# Altium PCB ar488_driver_pcb.PcbDoc
Units mil, origin at the board's own origin, x right, y up, seen from the top; angles counter-clockwise.
Board outline 2500 x 3399.72 mil, 2 copper layers (Top Layer, Bottom Layer); 6 components, 36 nets, 144 pads, 65 vias.
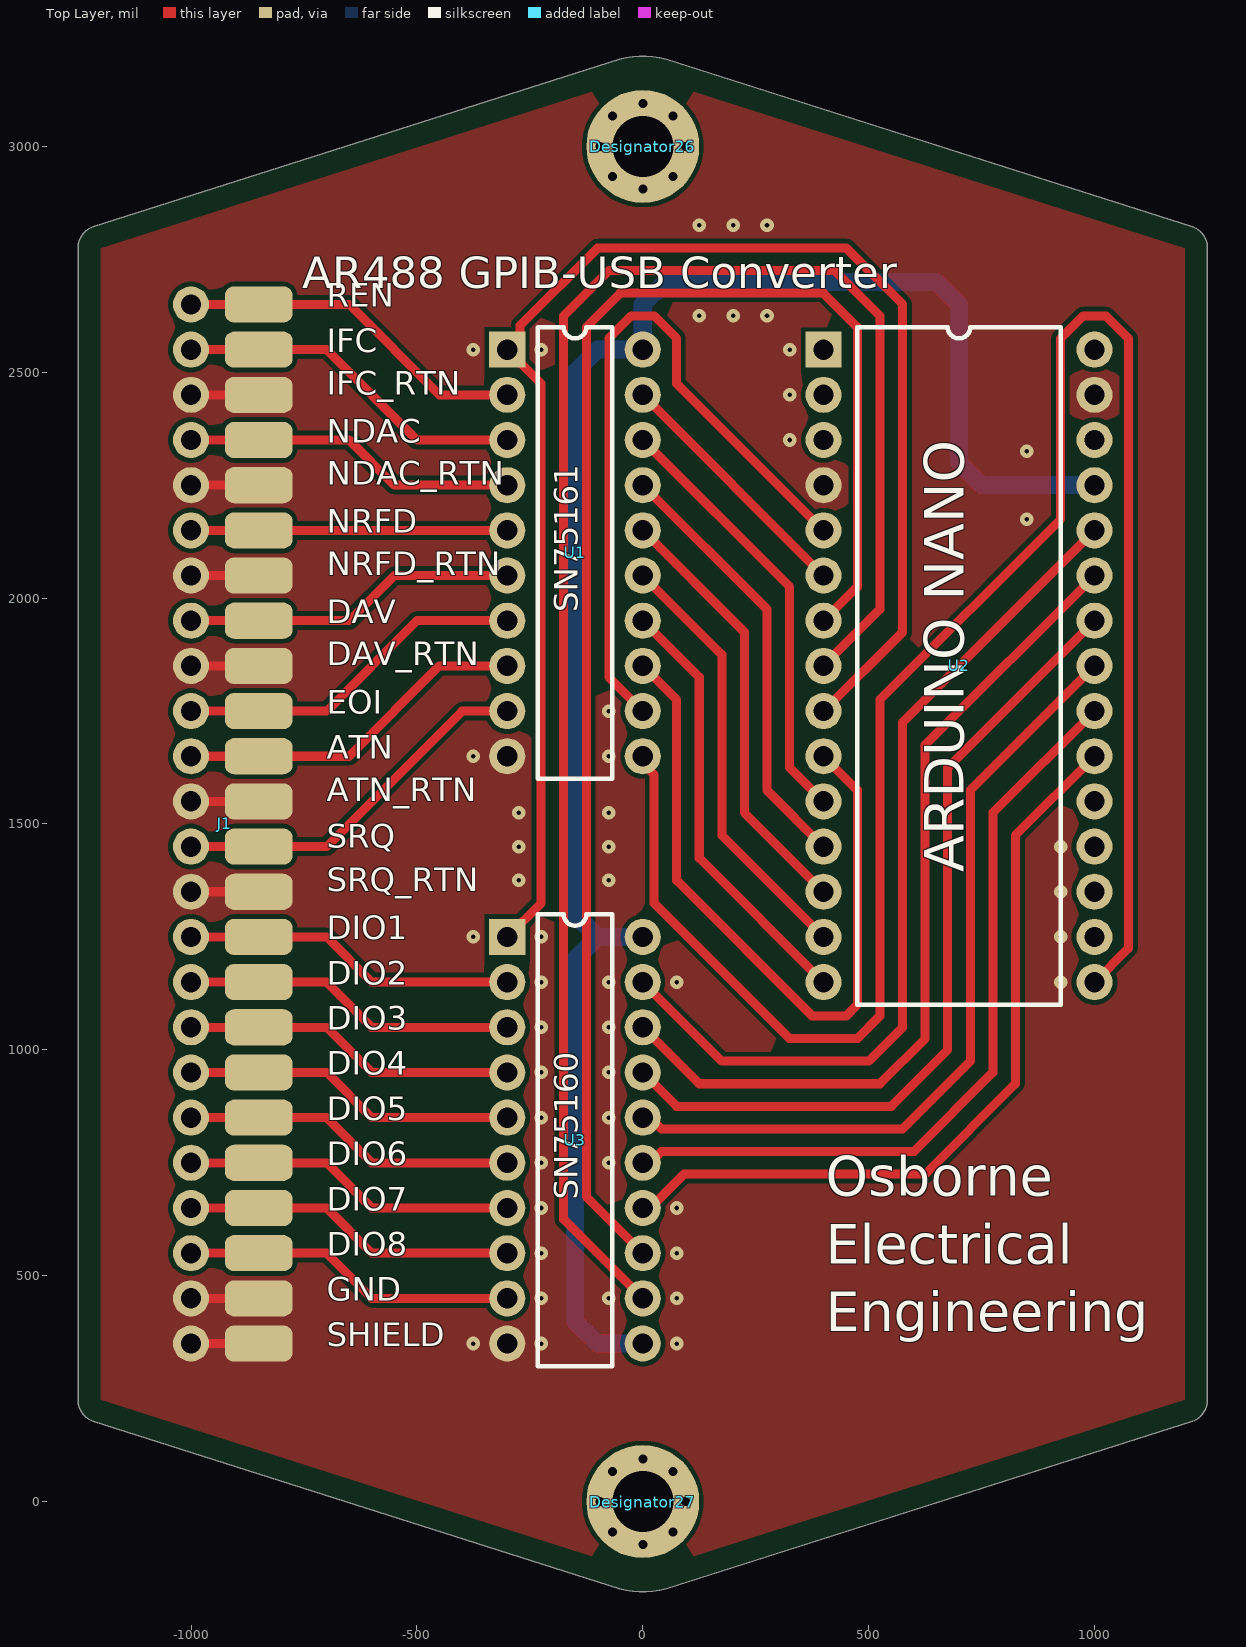
[diagram p0: Top Layer view]
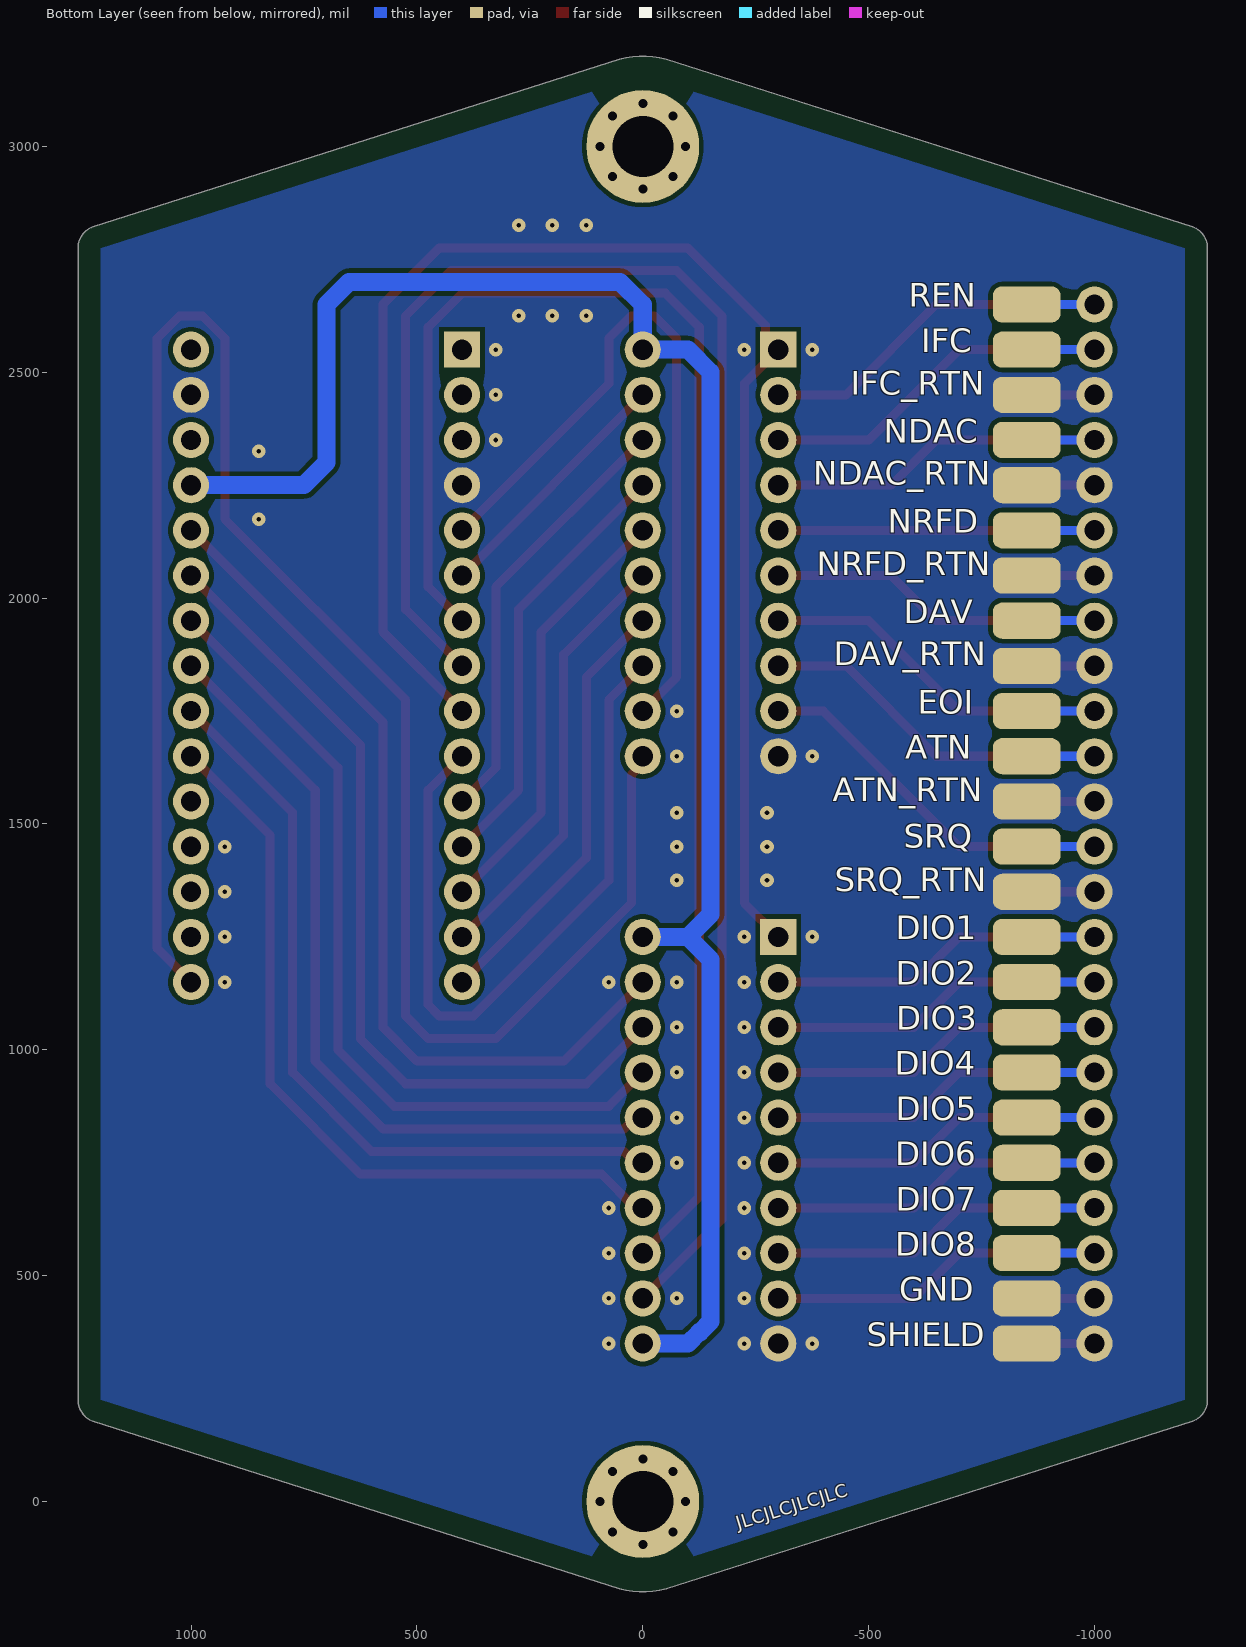
[diagram p1: Bottom Layer view, seen from below]

## Layer stack, top to bottom
Top Solder: solder mask 0.4, Solder Resist, Dk 3.5
Top Layer: signal copper 1.4
Dielectric 1: dielectric 12.6, FR-4, Dk 4.8
Bottom Layer: signal copper 1.4
Bottom Solder: solder mask 0.4, Solder Resist, Dk 3.5

## Board outline
-1250,225 -1250,2775 cw(c-1200,2775) -1217.1,2821.98 -51.76,3193.19 cw(c0,3000) 51.76,3193.19 1217.1,2821.98 cw(c1200,2775) 1250,2775 1250,225 cw(c1200,225) 1217.1,178.02 51.76,-193.19 cw(c0,0) -51.76,-193.19 -1217.1,178.02 cw(c-1200,225)

## Design rules (kind name [scope] priority, off if disabled: settings)
BoardOutlineClearance [All] p1: gap=50 ignorepadtopadclearanceinfootprint=FALSE
Clearance [All] p1: gap=10 ignorepadtopadclearanceinfootprint=FALSE
HoleSize [All] p1: absolutevalues=TRUE maxlimit=200 minlimit=1 maxpercent=80.000 minpercent=20.000
PolygonConnect [All] p1: connectstyle=Direct reliefconductorwidth=10 reliefentries=4 polygonreliefangle="90 Angle" airgapwidth=10
RoutingVias [All] p1: holewidth=28 width=50 viastyle="Through Hole" minholewidth=28 minwidth=50 maxholewidth=28 maxwidth=50
SolderMaskExpansion [All] p1: expansion=4 istentingtop=FALSE
Width [All] p1: maxlimit=100 minlimit=10 preferedwidth=10
29 further rules are at their usual default settings.

## Components (designator, comment, footprint, x,y, rotation, side; value= is the part's Value field where it differs from the comment)
Designator26 "Comment" MTG_HOLE_NO4 0,3000 r0 top locked
Designator27 "Comment" MTG_HOLE_NO4 0,0 r0 top locked
J1 "GPIB" GPIB -1000,2450 r0 top
U1 "SN75161" SN75161 -300,2550 r0 top
U2 "ArduinoNano" NANO 400,2550 r0 top
U3 "SN75160" SN75160 -300,1250 r0 top

## Footprints (in the part's own frame and the unit in brackets; to place one, negate y for a bottom-side part, rotate by r counter-clockwise, add the part's x,y. Pads: shape width x height; smd on the part's side, far side on the other; paste and mask are expansions set on the pad)
GPIB [mil]
  round 80 hole 45 paste-100: 1(0,-1200) 2(0,-1300) 3(0,-1400) 4(0,-1500) 5(0,-700) 6(0,-500) 7(0,-300) 8(0,-100) 9(0,100) 10(0,-1000) 11(0,-800) 12(0,-2100) 13(0,-1600) 14(0,-1700) 15(0,-1800) 16(0,-1900) 17(0,200) 18(0,-600) 19(0,-400) 20(0,-200) 21(0,0) 22(0,-1100) 23(0,-900) 24(0,-2000)
  rrect50% 150x80 smd far side paste-100: 1(150,-1200) 2(150,-1300) 3(150,-1400) 4(150,-1500) 5(150,-700) 6(150,-500) 7(150,-300) 8(150,-100) 9(150,100) 10(150,-1000) 11(150,-800) 12(150,-2100) 13(150,-1600) 14(150,-1700) 15(150,-1800) 16(150,-1900) 17(150,200) 18(150,-600) 19(150,-400) 20(150,-200) 21(150,0) 22(150,-1100) 23(150,-900) 24(150,-2000)
  rrect50% 150x80 smd paste-100: 1(150,-1200) 2(150,-1300) 3(150,-1400) 4(150,-1500) 5(150,-700) 6(150,-500) 7(150,-300) 8(150,-100) 9(150,100) 10(150,-1000) 11(150,-800) 12(150,-2100) 13(150,-1600) 14(150,-1700) 15(150,-1800) 16(150,-1900) 17(150,200) 18(150,-600) 19(150,-400) 20(150,-200) 21(150,0) 22(150,-1100) 23(150,-900) 24(150,-2000)
MTG_HOLE_NO4 [mil]
  round 250 hole 135: 0(0,0)
NANO [mil]
  rect 80x80 hole 45: 1(0,0)
  round 80 hole 45: 2(0,-100) 3(0,-200) 4(0,-300) 5(0,-400) 6(0,-500) 7(0,-600) 8(0,-700) 9(0,-800) 10(0,-900) 11(0,-1000) 12(0,-1100) 13(0,-1200) 14(0,-1300) 15(0,-1400) 16(600,-1400) 17(600,-1300) 18(600,-1200) 19(600,-1100) 20(600,-1000) 21(600,-900) 22(600,-800) 23(600,-700) 24(600,-600) 25(600,-500) 26(600,-400) 27(600,-300) 28(600,-200) 29(600,-100) 30(600,0)
  silkscreen extent 75,-1450 525,50
SN75160 [mil]
  rect 80x80 hole 45: 1(0,0)
  round 80 hole 45: 2(0,-100) 3(0,-200) 4(0,-300) 5(0,-400) 6(0,-500) 7(0,-600) 8(0,-700) 9(0,-800) 10(0,-900) 11(300,-900) 12(300,-800) 13(300,-700) 14(300,-600) 15(300,-500) 16(300,-400) 17(300,-300) 18(300,-200) 19(300,-100) 20(300,0)
  silkscreen extent 68,-950 232,50
SN75161 [mil]
  rect 80x80 hole 45: 1(0,0)
  round 80 hole 45: 2(0,-100) 3(0,-200) 4(0,-300) 5(0,-400) 6(0,-500) 7(0,-600) 8(0,-700) 9(0,-800) 10(0,-900) 11(300,-900) 12(300,-800) 13(300,-700) 14(300,-600) 15(300,-500) 16(300,-400) 17(300,-300) 18(300,-200) 19(300,-100) 20(300,0)
  silkscreen extent 68,-950 232,50

## Part data
J1: "Wire-to-Board GPIB Connections"
U1: "Octal General-Purpose Interface Bus Tranceiver", Supplier Part Number 1=595-SN75161BN, Supplier 1=Mouser
U2: "Arduino Nano", Supplier Part Number 1=782-A000005, Supplier 1=Mouser
U3: "Octal General-Purpose Interface Bus Tranceiver", Supplier Part Number 1=595-SN75160BN, Supplier 1=Mouser

## Via types
v1: diameter 30, hole 10, Top Layer to Bottom Layer, tented both sides, 49 vias
v2: diameter 44, hole 20, Top Layer to Bottom Layer, tented both sides, 16 vias

## Nets (pads, with @x,y where several pads share a name; then routed paths per layer and width w, separated by ;. In a path a pad name is that pad's centre, name@x,y a point inside that pad or via, vN(x,y) a via of type N, cw(c..) or ccw(c..) an arc to the next point about the centre after c; other vN are vias at no path point)
ATN: U1.13 U2.10 | length 1621.8
  Top Layer w20: U1.13 75,1775 75,1375 375,1075 450,1075 475,1100 475,1575 U2.10
D1: U2.26 U3.19 | length 1954.6
  Top Layer w20: U3.19 175,975 500,975 575,1050 575,1725 U2.26
D2: U2.25 U3.18 | length 1898.5
  Top Layer w20: U3.18 125,925 525,925 625,1025 625,1675 U2.25
D3: U2.24 U3.17 | length 1842.5
  Top Layer w20: U3.17 75,875 550,875 675,1000 675,1625 U2.24
D4: U2.23 U3.16 | length 1786.4
  Top Layer w20: U3.16 16.24,850 41.24,825 575,825 725,975 725,1575 U2.23
D5: U2.22 U3.15 | length 1751
  Top Layer w20: U3.15 16.24,750 41.24,775 600,775 775,950 775,1525 U2.22
D6: U2.21 U3.14 | length 1736.4
  Top Layer w20: U3.14 16.24,650 91.24,725 625,725 825,925 825,1475 U2.21
D7: U2.7 U3.13 | length 3445
  Top Layer w20: U3.13 -125,675 -125,2600 -50,2675 400,2675 475,2600 475,2025 U2.7
D8: U2.8 U3.12 | length 3857.1
  Top Layer w20: U3.12 -175,625 -175,2625 -75,2725 425,2725 525,2625 525,1975 U2.8
DAV: U1.15 U2.14 | length 965.7
  Top Layer w20: U1.15 175,1875 175,1475 U2.14
DC: U1.11 U2.16 | length 4293.5
  Top Layer w20: U1.11 0,1633.76 25,1608.76 25,1325 325,1025 475,1025 525,1075 525,1775 925,2175 925,2575 975,2625 1025,2625 1075,2575 1075,1225 U2.16
EOI: U1.14 U2.15 | length 965.7
  Top Layer w20: U1.14 125,1825 125,1425 U2.15
GND: J1.12 J1.18 J1.19 J1.20 J1.21 J1.22 J1.23 J1.24 U1.10 U2.4 U2.29 U3.10 | length 1200
  Top Layer w20: J1.12@-1000,350 J1.12@-850,350 ; J1.24@-1000,450 J1.24@-850,450 ; J1.22@-1000,1350 J1.22@-850,1350 ; J1.23@-1000,1550 J1.23@-850,1550 ; J1.18@-1000,1850 J1.18@-850,1850 ; J1.19@-1000,2050 J1.19@-850,2050 ; J1.20@-1000,2250 J1.20@-850,2250 ; J1.21@-1000,2450 J1.21@-850,2450
  other v1: -375,350 -225,350 75,350 -225,450 -75,450 75,450 -225,550 75,550 -225,650 75,650 -225,750 -75,750 -225,850 -75,850 -225,950 -75,950 -225,1050 -75,1050 -225,1150 -75,1150 75,1150 925,1150 -375,1250 -225,1250 925,1250 925,1350 -275,1375 -75,1375 -275,1450 -75,1450 925,1450 -275,1525 -75,1525 -375,1650 -75,1650 -75,1750 850,2175 850,2325 325,2350 325,2450 -375,2550 -225,2550 325,2550 125,2625 200,2625 275,2625 125,2825 200,2825 275,2825
IFC: U1.18 U2.11 | length 965.7
  Top Layer w20: U1.18 325,2025 325,1625 U2.11
NDAC: U1.17 U2.12 | length 965.7
  Top Layer w20: U1.17 275,1975 275,1575 U2.12
NetJ1_1: J1.1 U3.2 | length 891.4
  Top Layer w20: J1.1@-1000,1250 -850,1250 -700,1250 -600,1150 U3.2
  Bottom Layer w20: J1.1@-1000,1250 J1.1@-850,1250
NetJ1_2: J1.2 U3.3 | length 891.4
  Top Layer w20: J1.2@-1000,1150 -850,1150 -700,1150 -600,1050 U3.3
  Bottom Layer w20: J1.2@-1000,1150 J1.2@-850,1150
NetJ1_3: J1.3 U3.4 | length 891.4
  Top Layer w20: J1.3@-1000,1050 -850,1050 -700,1050 -600,950 U3.4
  Bottom Layer w20: J1.3@-1000,1050 J1.3@-850,1050
NetJ1_4: J1.4 U3.5 | length 891.4
  Top Layer w20: J1.4@-1000,950 -850,950 -700,950 -600,850 U3.5
  Bottom Layer w20: J1.4@-1000,950 J1.4@-850,950
NetJ1_5: J1.5 U1.7 | length 932.8
  Top Layer w20: J1.5@-1000,1750 -850,1750 -700,1750 -500,1950 U1.7
  Bottom Layer w20: J1.5@-1000,1750 J1.5@-850,1750
NetJ1_6: J1.6 U1.6 | length 891.4
  Top Layer w20: J1.6@-1000,1950 -850,1950 -650,1950 -550,2050 U1.6
  Bottom Layer w20: J1.6@-1000,1950 J1.6@-850,1950
NetJ1_7: J1.7 U1.5 | length 850
  Top Layer w20: J1.7@-1000,2150 -850,2150 U1.5
  Bottom Layer w20: J1.7@-1000,2150 J1.7@-850,2150
NetJ1_8: J1.8 U1.4 | length 891.4
  Top Layer w20: J1.8@-1000,2350 -850,2350 -650,2350 -550,2250 U1.4
  Bottom Layer w20: J1.8@-1000,2350 J1.8@-850,2350
NetJ1_9: J1.9 U1.3 | length 932.8
  Top Layer w20: J1.9@-1000,2550 -850,2550 -700,2550 -500,2350 U1.3
  Bottom Layer w20: J1.9@-1000,2550 J1.9@-850,2550
NetJ1_10: J1.10 U1.9 | length 974.3
  Top Layer w20: J1.10@-1000,1450 -850,1450 -700,1450 -400,1750 U1.9
  Bottom Layer w20: J1.10@-1000,1450 J1.10@-850,1450
NetJ1_11: J1.11 U1.8 | length 932.8
  Top Layer w20: J1.11@-1000,1650 -850,1650 -650,1650 -450,1850 U1.8
  Bottom Layer w20: J1.11@-1000,1650 J1.11@-850,1650
NetJ1_13: J1.13 U3.6 | length 891.4
  Top Layer w20: J1.13@-1000,850 -850,850 -700,850 -600,750 U3.6
  Bottom Layer w20: J1.13@-1000,850 J1.13@-850,850
NetJ1_14: J1.14 U3.7 | length 891.4
  Top Layer w20: J1.14@-1000,750 -850,750 -700,750 -600,650 U3.7
  Bottom Layer w20: J1.14@-1000,750 J1.14@-850,750
NetJ1_15: J1.15 U3.8 | length 891.4
  Top Layer w20: J1.15@-1000,650 -850,650 -700,650 -600,550 U3.8
  Bottom Layer w20: J1.15@-1000,650 J1.15@-850,650
NetJ1_16: J1.16 U3.9 | length 891.4
  Top Layer w20: J1.16@-1000,550 -850,550 -700,550 -600,450 U3.9
  Bottom Layer w20: J1.16@-1000,550 J1.16@-850,550
NetJ1_17: J1.17 U1.2 | length 932.8
  Top Layer w20: J1.17@-1000,2650 -850,2650 -650,2650 -450,2450 U1.2
  Bottom Layer w20: J1.17@-1000,2650 J1.17@-850,2650
NRFD: U1.16 U2.13 | length 965.7
  Top Layer w20: U1.16 225,1925 225,1525 U2.13
REN: U1.19 U2.6 | length 565.7
  Top Layer w20: U1.19 U2.6
SRQ: U1.12 U2.5 | length 1607.1
  Top Layer w20: U1.12 -75,1825 -75,2575 -25,2625 25,2625 75,2575 75,2475 U2.5
TE: U1.1 U2.9 U3.1 | length 3369.2
  Top Layer w20: U3.1 -225,1325 -225,2475 U1.1 -271.29,2578.71 -271.29,2603.71 -100,2775 450,2775 575,2650 575,1925 U2.9
VCC: U1.20 U2.27 U3.11 U3.20 | length 4095.9
  Bottom Layer w40: U3.11 -75,350 -100,350 -125,375 -126.57,375 -150,398.43 -150,1200 -100,1250 ; U3.20 -100,1250 ; U2.27 750,2250 700,2300 700,2650 650,2700 50,2700 0,2650 U1.20 -100,2550 -150,2500 -150,1300 -100,1250
pads on no net: Designator26.0 Designator27.0 U2.1 U2.2 U2.3 U2.17 U2.18 U2.19 U2.20 U2.28 U2.30
copper on no net:
  other v2: 0,-94.5 -66.82,-66.82 66.82,-66.82 -94.5,0 94.5,0 -66.82,66.82 66.82,66.82 0,94.5 0,2905.5 -66.82,2933.18 66.82,2933.18 -94.5,3000 94.5,3000 -66.82,3066.82 66.82,3066.82 0,3094.5

## Polygon pours and split planes (outlines as drawn)
GND on Bottom Layer "GND_L02_P000" (solid, remove dead copper, pour order 0): -1250,3193.19 1250,3193.19 1250,-193.19 -1250,-193.19
GND on Top Layer "GND_L01_P001" (solid, remove dead copper, pour order 1): -1250,3193.19 1250,3193.19 1250,-193.19 -1250,-193.19

## Silkscreen, mask and mechanical layers (free items; w line width, h text height)
Top Overlay:
  text "AR488 GPIB-USB Converter" at -753.46,2662.5 h120
  text "Osborne / Electrical / Engineering" at 404.49,347.9 h150
Bottom Overlay:
  text "JLCJLCJLCJLC" at -211.08,-62.29 h30 r343
Board Shape:
  the board outline again, w20

## Text inside footprints (layer, text, board x,y; h text height)
J1: Top Overlay "DIO1" at -700,1226.72 h90; Top Overlay "DIO2" at -700,1126.72 h90; Top Overlay "DIO3" at -700,1026.72 h90; Top Overlay "DIO4" at -700,926.72 h90; Top Overlay "EOI" at -700,1726.72 h90; Top Overlay "DAV" at -700,1926.72 h90; Top Overlay "NRFD" at -700,2126.8 h90; Top Overlay "NDAC" at -700,2326.72 h90; Top Overlay "IFC" at -700,2526.72 h90; Top Overlay "SRQ" at -700,1429.8 h90; Top Overlay "ATN" at -700,1626.72 h90; Top Overlay "SHIELD" at -700,326.72 h90; Top Overlay "DIO5" at -700,826.72 h90; Top Overlay "DIO6" at -700,726.72 h90; Top Overlay "DIO7" at -700,626.72 h90; Top Overlay "DIO8" at -700,526.72 h90; Top Overlay "REN" at -700,2626.8 h90; Top Overlay "DAV_RTN" at -700,1833.17 h90; Top Overlay "NRFD_RTN" at -700,2033.26 h90; Top Overlay "NDAC_RTN" at -700,2233.01 h90; Top Overlay "IFC_RTN" at -700,2433.01 h90; Top Overlay "SRQ_RTN" at -700,1332.97 h90; Top Overlay "ATN_RTN" at -700,1533.17 h90; Top Overlay "GND" at -700,426.72 h90; Bottom Overlay "DAV" at -577.72,1926.72 h90; Bottom Overlay "DIO1" at -560.06,1226.72 h90; Bottom Overlay "DIO2" at -560.22,1126.72 h90; Bottom Overlay "DIO3" at -560.56,1026.72 h90; Bottom Overlay "DIO4" at -558.22,926.72 h90; Bottom Overlay "NRFD" at -542.65,2126.8 h90; Bottom Overlay "NDAC" at -533.32,2326.72 h90; Bottom Overlay "IFC" at -616.37,2526.72 h90; Bottom Overlay "SRQ" at -577.63,1429.8 h90; Bottom Overlay "ATN" at -581.3,1626.72 h90; Bottom Overlay "DAV_RTN" at -422.28,1833.17 h90; Bottom Overlay "NRFD_RTN" at -385.21,2033.26 h90; Bottom Overlay "NDAC_RTN" at -377.21,2233.01 h90; Bottom Overlay "IFC_RTN" at -460.26,2433.01 h90; Bottom Overlay "SRQ_RTN" at -424.94,1332.97 h90; Bottom Overlay "ATN_RTN" at -421.03,1533.17 h90; Bottom Overlay "EOI" at -609.04,1726.72 h90; Bottom Overlay "SHIELD" at -495.25,326.72 h90; Bottom Overlay "DIO5" at -560.39,826.72 h90; Bottom Overlay "DIO6" at -559.06,726.72 h90; Bottom Overlay "DIO7" at -559.47,626.72 h90; Bottom Overlay "DIO8" at -559.14,526.72 h90; Bottom Overlay "REN" at -588.71,2626.8 h90; Bottom Overlay "GND" at -567.22,426.72 h90
U2: Top Overlay "ARDUINO NANO" at 738.79,1392.83 h150 r90